# Allegro board CWO.brd
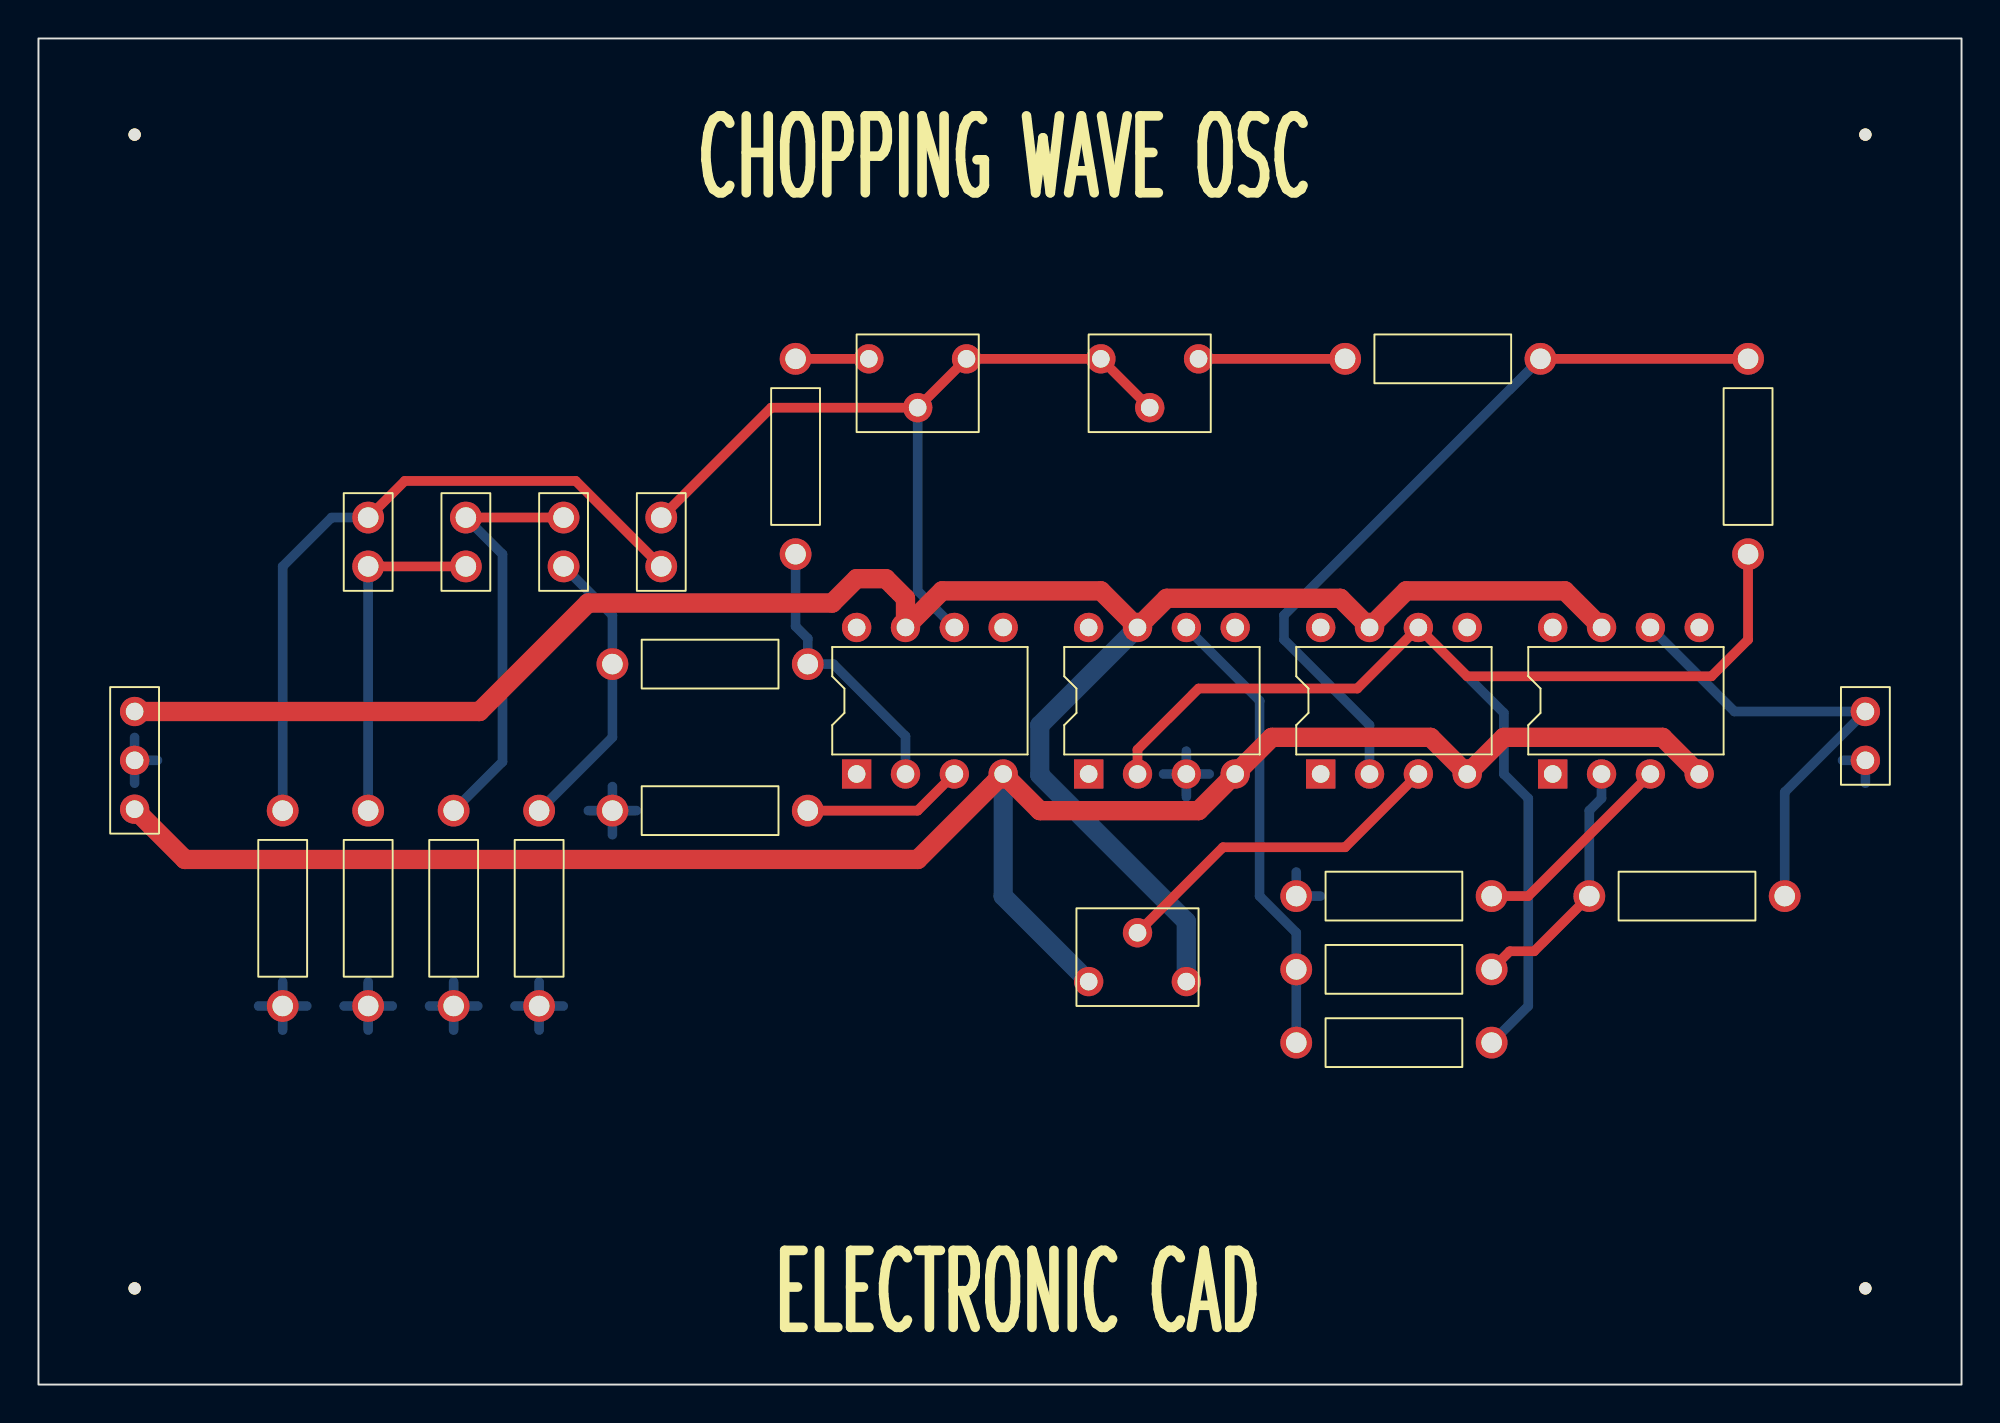
[diagram p0: board, top side]
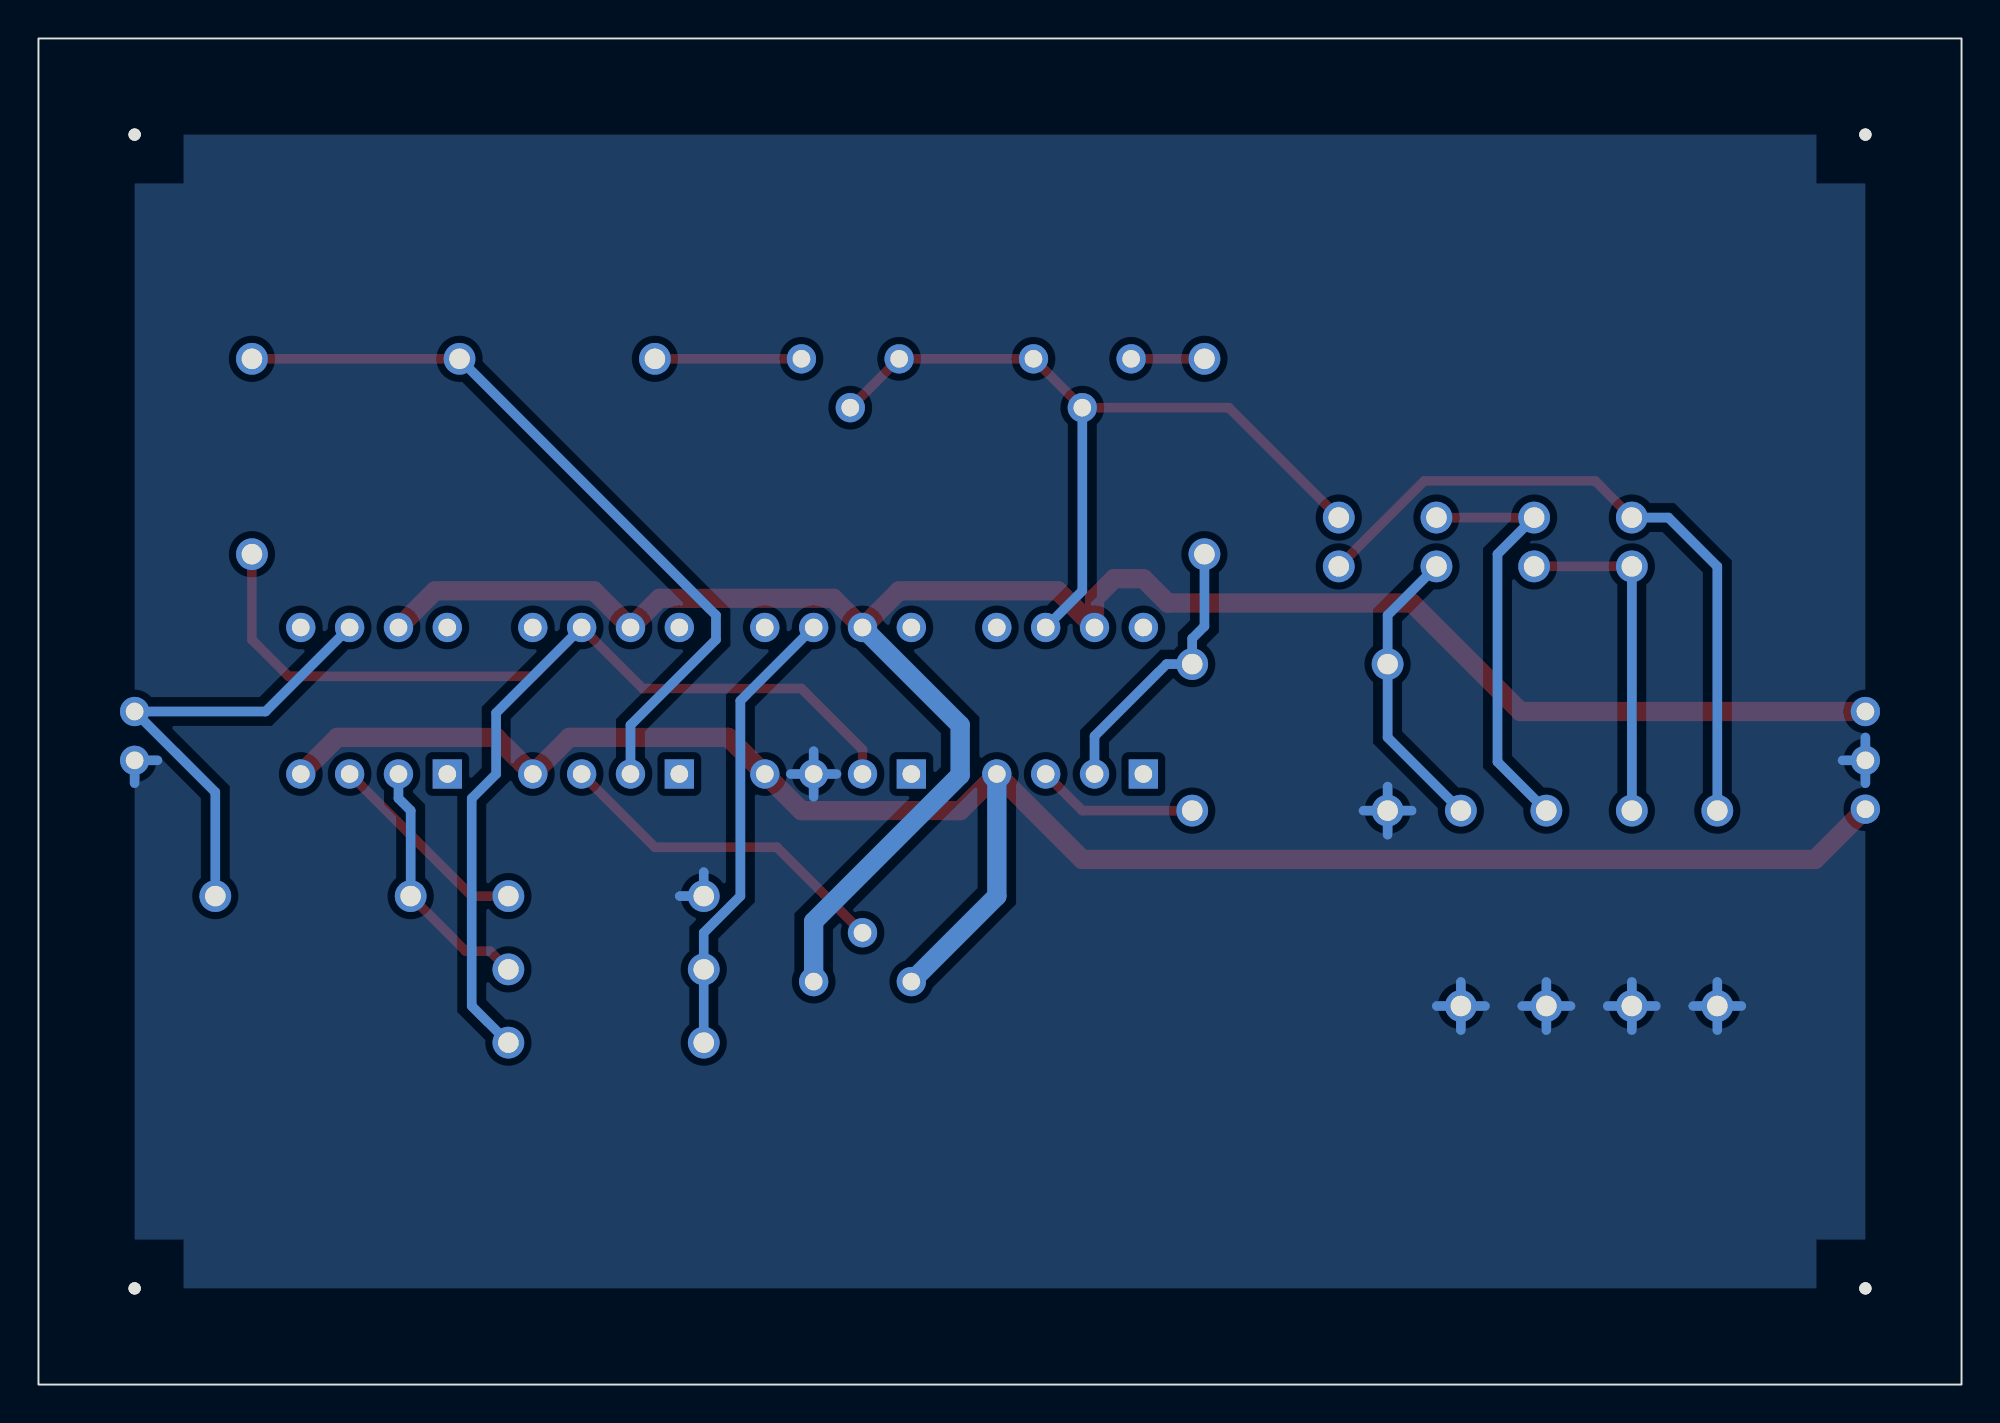
[diagram p1: board, bottom side, seen from below]

Outline 100 x 70 mm; copper layers: TOP, BOTTOM. Coordinates in mm from the lower left corner of the outline.
Outline path: rectangle 0,0 100,70

## Design rules (mm)
constraint set DEFAULT: min track width 0.5
nets with their own width: min track width 1; nets +12V -12V GND

## Placement (name value [footprint] x y rotation side)
C1  0.001uF  [CAPCK05]  32.38 42.55 0 top
C2  0.001uF  [CAPCK05]  17.14 45.09 180 top
C3  0.001uF  [CAPCK05]  22.23 42.55 0 top
C4  0.001uF  [CAPCK05]  27.3 45.09 180 top
J1  CON3  [JUMPER3]  5 35 270 top
J2  CON2  [JUMPER2]  95 35 270 top
NOREF  -  [unnamed]  95 5 0 top
NOREF#2  -  [unnamed]  95 65 0 top
NOREF#3  -  [unnamed]  5 5 0 top
NOREF#4  -  [#2]  100 0 90 top
NOREF#5  -  [unnamed]  5 65 0 top
NOREF#6  -  [#2]  0 70 0 top
R1  10K  [RES400]  88.9 53.34 180 top
R2  15K  [RES400]  39.37 53.34 180 top
R3  10K  [RES400]  29.84 37.47 270 top
R4  20K  [RES400]  67.94 53.34 270 top
R5  4.7K  [RES400]  12.7 29.84 180 top
R6  4.7K  [RES400]  17.14 29.84 180 top
R7  4.7K  [RES400]  21.59 29.84 180 top
R8  4.7K  [RES400]  26.04 29.84 180 top
R9  1K  [RES400]  40.01 29.84 90 top
R10  8.2K  [RES400]  75.56 17.78 90 top
R11  10K  [RES400]  80.64 25.4 270 top
R12  2.2K  [RES400]  65.41 21.59 270 top
R13  5.1K  [RES400]  75.56 25.4 90 top
U1  LF356  [DIP8_3]  42.55 31.75 90 top
U2  LF356  [DIP8_3]  66.67 31.75 90 top
U3  LF356  [DIP8_3]  54.61 31.75 90 top
U4  LF356  [DIP8_3]  78.74 31.75 90 top
VR1  470K  [RESADJ]  43.18 53.34 90 top
VR2  100K  [RESADJ]  55.24 53.34 90 top
VR3  10K  [RESADJ]  59.69 20.95 270 top

## Library data of the parts
C1-C4 = CAP NP: Tolerance: ***; User Part Number: ***
J1 = CON3: User Part Number: ***
J2 = CON2: User Part Number: ***
R1-R13 = R: Tolerance: ***; User Part Number: ***
U1 = LF356_1: Tolerance: ***; User Part Number: ***
U2 = LF356_2: Tolerance: ***; User Part Number: ***
U3 = LF356_3: Tolerance: ***; User Part Number: ***
U4 = LF356_4: Tolerance: ***; User Part Number: ***
VR1-VR3 = POT: Tolerance: ***; User Part Number: ***

## Footprints (pads in the part's own frame, mm; a bottom-side part is the same pattern mirrored in y, then rotated)
CAPCK05
  round 1.651 hole 1.067: 1(0,0) 2(0,2.54)
DIP8_3
  rect 1.524x1.524 hole 0.914: 1(0,0)
  round 1.524 hole 0.914: 2(0,-2.54) 3(0,-5.08) 4(0,-7.62) 5(7.62,-7.62) 6(7.62,-5.08) 7(7.62,-2.54) 8(7.62,0)
JUMPER2
  round 1.524 hole 0.914: 1(0,0) 2(2.54,0)
JUMPER3
  round 1.524 hole 0.914: 1(0,0) 2(2.54,0) 3(5.08,0)
RES400
  round 1.651 hole 1.067: 1(0,0) 2(0,10.16)
RESADJ
  round 1.524 hole 0.914: 1(0,0) 2(-2.54,-2.54) 3(0,-5.08)
unnamed
  round 0.635 hole 3.175 unplated: (0,0)

## Nets
+12V: J1.1 U1.7 U2.7 U3.7 U4.7 VR3.1
-12V: J1.3 U1.4(V-) U2.4(V-) U3.4(V-) U4.4(V-) VR3.3
GND: J1.2 J2.2 R5.2 R6.2 R7.2 R8.2 R9.2 R13.2 U3.3
OUT: J2.1 R11.2 U4.6
SIG: R1.2 R10.1 U2.6 U3.2
N00479: R1.1 R4.2 U2.2
N00494: U2.3 VR3.2(WIPER)
N00741: R4.1 VR2.3
N00782: C1.2 U1.6 VR1.2(WIPER) VR1.3 VR2.1 VR2.2(WIPER)
N01220: R9.1 U1.3
N01337: R2.1 VR1.1
N01341: R2.2 R3.2 U1.2
N01425: C4.2 R3.1 R8.1
N01505: C3.2 C4.1 R7.1
N01567: C2.2 C3.1 R6.1
N01798: C1.1 C2.1 R5.1
N02591: R10.2 R12.1 U3.6
N02891: R11.1 R12.2 U4.2
N02895: R13.1 U4.3

Pads without a net: U1 1 5 8; U2 1 5 8; U3 1 5 8; U4 1 5 8

## Routing (per net, layer and track width the routed paths; a pad name or vN(x,y) marks a point on that pad's centre or on a via; arc(x,y) is an arc through that point)
+12V: length 109.2
  TOP w1: U4.7 79.38,41.27 71.12,41.27 U2.7 67.7,40.89 58.67,40.89 U3.7 55.24,41.27 46.99,41.27 U1.7 45.09,40.89 44.06,41.91 42.54,41.91 41.27,40.64 28.57,40.64 22.93,35 J1.1
  BOTTOM w1: U3.7 52.07,34.29 52.07,31.7 59.69,24.08 VR3.1
-12V: length 101.7
  TOP w1: J1.3 7.62,27.3 45.72,27.3 U1.4 52.07,29.84 60.33,29.84 U3.4 64.14,33.66 72.39,33.66 U2.4 76.2,33.66 84.45,33.66 U4.4
  BOTTOM w1: U1.4 50.16,25.4 VR3.3
GND: length 38.2
  BOTTOM w0.5: 17.14,18.43 R6.2 ; R6.2 18.4,19.68 ; R6.2 15.89,19.68 ; R6.2 17.14,20.94 ; 20.34,19.68 R7.2 ; R7.2 22.84,19.68 ; R7.2 21.59,18.43 ; R7.2 21.59,20.94 ; R8.2 26.04,20.94 ; R8.2 27.29,19.68 ; R8.2 24.78,19.68 ; R8.2 26.04,18.43 ; R5.2 12.7,20.94 ; R5.2 12.7,18.43 ; R5.2 11.45,19.68 ; R5.2 13.95,19.68 ; J1.2 6.19,32.46 ; J1.2 5,31.27 ; J1.2 5,33.65 ; 65.41,26.65 R13.2 66.66,25.4 ; 28.59,29.84 29.84,29.84 ; 29.84,29.84 29.84,31.1 ; 29.84,29.84 29.84,28.59 ; 29.84,29.84 31.1,29.84 ; U3.3 59.69,32.94 ; U3.3 60.88,31.75 ; U3.3 59.69,30.56 ; U3.3 58.5,31.75 ; 93.81,32.46 J2.2 95,31.27
OUT: length 24.3
  BOTTOM w0.5: R11.2 90.81,30.8 J2.1 88.19,35 U4.6
SIG: length 66.7
  TOP w0.5: U3.2 57.15,33.02 60.33,36.2 68.58,36.2 U2.6 74.3,36.83 87,36.83 88.9,38.73 R1.2
  BOTTOM w0.5: R10.1 77.47,19.68 77.47,30.48 76.2,31.75 76.2,34.92 U2.6
N00479: length 39.7
  TOP w0.5: R4.2 R1.1
  BOTTOM w0.5: R4.2 64.77,40.01 64.77,38.73 69.22,34.29 U2.2
N00494: length 18
  TOP w0.5: U2.3 67.94,27.94 61.59,27.94 57.15,23.5
N00741: length 7.6
  TOP w0.5: R4.1 VR2.3
N00782: length 42.1
  TOP w0.5: VR2.2 VR2.1 VR1.3 VR1.2 38.1,50.8 C1.2
  BOTTOM w0.5: VR1.2 45.72,41.27 U1.6
N01220: length 8.4
  TOP w0.5: U1.3 45.72,29.84 R9.1
N01337: length 3.8
  TOP w0.5: R2.1 VR1.1
N01341: length 14.6
  BOTTOM w0.5: U1.2 45.09,33.72 41.34,37.47 R3.2 40.01,38.8 39.37,39.43 R2.2
N01425: length 15.3
  BOTTOM w0.5: R8.1 29.84,33.66 R3.1 29.84,40.01 C4.2
N01505: length 22.2
  TOP w0.5: C4.1 C3.2
  BOTTOM w0.5: R7.1 24.13,32.38 24.13,43.18 C3.2
N01567: length 17.8
  TOP w0.5: C2.2 C3.1
  BOTTOM w0.5: C2.2 R6.1
N01798: length 36.1
  TOP w0.5: C2.1 19.05,46.99 27.94,46.99 C1.1
  BOTTOM w0.5: C2.1 15.24,45.09 12.7,42.55 R5.1
N02591: length 24
  BOTTOM w0.5: R10.2 R12.1 65.41,23.5 63.5,25.4 63.5,35.56 U3.6
N02891: length 13.3
  TOP w0.5: R11.1 77.78,22.53 76.51,22.53 R12.2
  BOTTOM w0.5: R11.1 80.64,29.85 81.28,30.48 U4.2
N02895: length 10.9
  TOP w0.5: U4.3 77.47,25.4 R13.1

## Copper pours and planes (outline as drawn; the poured copper is in the pictures)
GND on BOTTOM: 5,5 5,65 95,65 95,5

## Text on the board
Ref Des/Silkscreen Top: CHOPPING WAVE OSC | ELECTRONIC CAD
DIMENSION: FIGURE | FINISHED_SIZE | 0.914 | 1.067 | 3.175 | DRILL CHART: TOP to BOTTOM | ALL UNITS ARE IN MILLIMETERS | PLATED | NON-PLATED | QTY | 46 | 34 | 4
